# Altium PCB Scooter - Secondary Board - PCB Layout.PcbDoc
Units mm, origin at the board's own origin, x right, y up, seen from the top; angles counter-clockwise.
Board outline 51.43 x 39.37 mm, 2 copper layers (Top Layer, Bottom Layer); 10 components, 11 nets, 43 pads, 9 vias.
Unrouted connection lines stored in the file: 1.
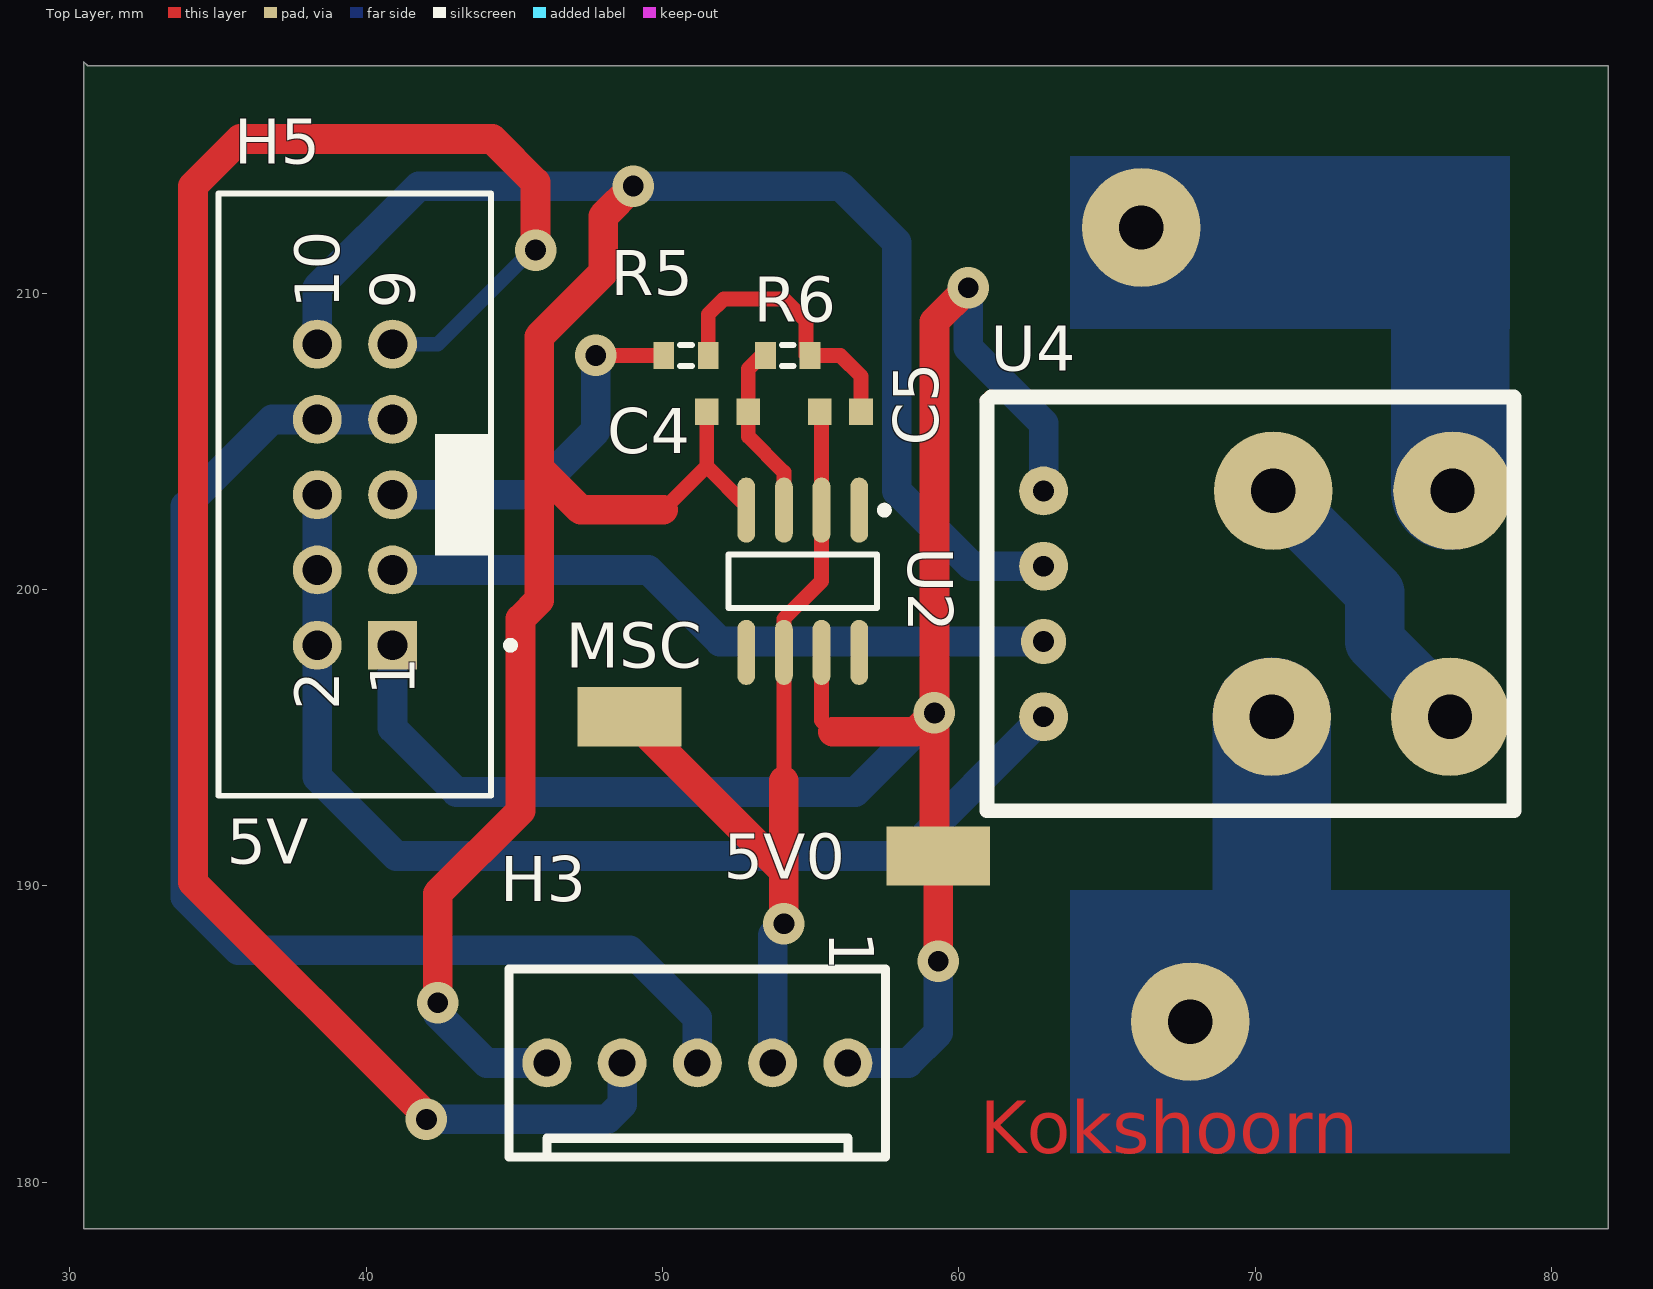
[diagram p0: Top Layer view]
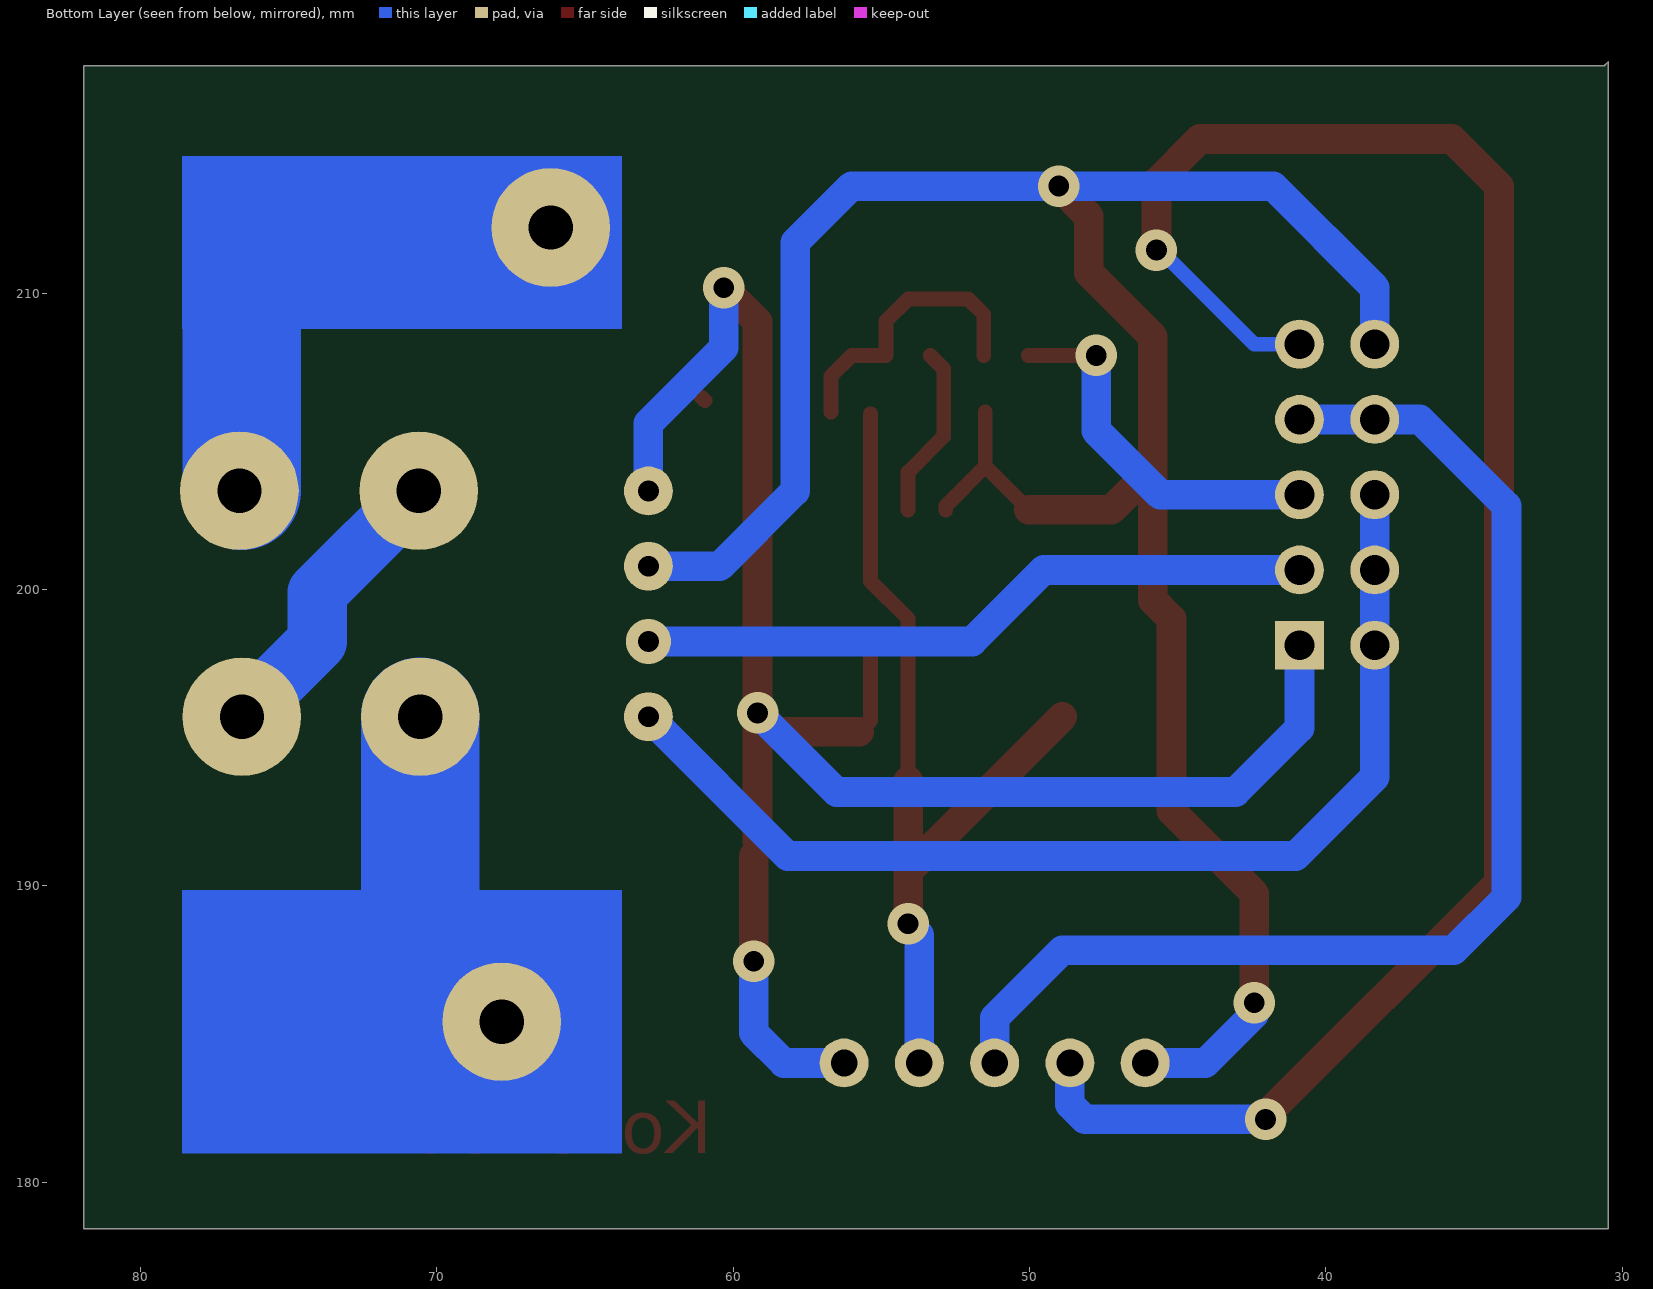
[diagram p1: Bottom Layer view, seen from below]

## Layer stack, top to bottom
Top Layer: signal copper 0.0356
Dielectric: dielectric 0.32, FR-4, Dk 4.8
Bottom Layer: signal copper 0.0356

## Board outline
30.48,217.805 30.607,217.678 81.915,217.678 81.915,178.435 30.48,178.435

## Design rules (kind name [scope] priority, off if disabled: settings)
Clearance [All] p1: gap=0.254
HoleSize [All] p1: absolutevalues=TRUE maxlimit=4 minlimit=0.3 maxpercent=80.000 minpercent=20.000
MinimumSolderMaskSliver [All] p1 off: minsoldermaskwidth=0.254
NetAntennae [All] p1 off: netantennaetolerance=0
PolygonConnect [All] p1: connectstyle=Relief reliefconductorwidth=0.254 reliefentries=4 polygonreliefangle="90 Angle" airgapwidth=0.254
RoutingVias [All] p1: holewidth=0.7 width=1.4 viastyle="Through Hole" minholewidth=0.7 minwidth=1.4 maxholewidth=0.7 maxwidth=1.5
SilkToSilkClearance [All] p1 off: silktosilkclearance=0.254
SilkToSolderMaskClearance SilkscreenOverComponentPads [IsPad] p1 off: minsilkscreentomaskgap=0.254 clearancetoexposedcopper=TRUE
SolderMaskExpansion [All] p1: expansion=0.102
Width [All] p1: maxlimit=5 minlimit=0.5 preferedwidth=0.5
23 further rules are at their usual default settings.

## Components (designator, comment, footprint, x,y, rotation, side; value= is the part's Value field where it differs from the comment)
5V0 "TP" TEST_POINT_3.5X2MM 59.309,191.008 r180 top
C4 "100nF" CAPC1608L 52.197,205.994 r0 top
C5 "100nF" CAPC1608L 56.007,205.994 r0 top
H3 "5 Pin Molex KK Hdr" MOLEX_KK_5_HDR 56.261,184.023 r180 top
H5 "Header 5X2 Vert" IDC2.54-V10D 39.624,203.2 r90 top
MSC "TP" TEST_POINT_3.5X2MM 48.895,195.707 r180 top
R5 "100k" RESC1608L 50.8,207.899 r180 top
R6 "100k" RESC1608L 54.229,207.899 r0 top
U2 "uA741C" SO8_N 54.737,200.279 r270 top
U4 "LEM - HXS 10-NP/SP3" PCBComponent_1 62.865,203.327 r270 top

## Footprints (in the part's own frame and the unit in brackets; to place one, negate y for a bottom-side part, rotate by r counter-clockwise, add the part's x,y. Pads: shape width x height; smd on the part's side, far side on the other; paste and mask are expansions set on the pad)
CAPC1608L [mm] "Chip Capacitor, Body 1.6x0.8mm, IPC High Density"
  rect 0.8x0.9 smd: 1(-0.7,0) 2(0.7,0)
  body extent -0.87,-0.48 0.87,0.48, height 0.85
IDC2.54-V10D [mm] "Connector; IDC, Low Profile Male Header, Thru-Hole; 10 Position; Vertical; Pitch 2.54 mm; Body 20.32 x 9.2 x 9.45 mm (LxWxH)"
  rect 1.65x1.65 hole 1: 1(-5.08,-1.27)
  round 1.65 hole 1: 2(-5.08,1.27) 3(-2.54,-1.27) 4(-2.54,1.27) 5(0,-1.27) 6(0,1.27) 7(2.54,-1.27) 8(2.54,1.27) 9(5.08,-1.27) 10(5.08,1.27)
  silkscreen extent -10.16,-5.38 10.16,4.6, body extent -10.16,-4.6 10.16,4.6, height 9.45
MOLEX_KK_5_HDR [mil] "MOLEX_KK_5_HDR"
  round 65 hole 35.43: 1(0,0) 2(100,0) 3(200,0) 4(300,0) 5(400,0)
  silkscreen extent -50,-125 450,125, body extent -44,-118 444,118, height 630
PCBComponent_1 [mm]
  round 1.524 hole 0.7: 1(5.08,0)
  round 4 hole 1.5: 2(7.62,7.7) 7(0,13.8) 8(0,7.747) 9(7.62,13.716)
  round 1.65 hole 0.7: 3(0,0) 4(2.54,0) 5(7.62,0)
  Top Layer lines w0.5: -3.048,-1.905 -3.175,-1.778
  silkscreen extent -3.18,-1.91 10.79,15.88
RESC1608L [mm] "Chip Resistor, Body 1.6x0.8mm, IPC High Density"
  rect 0.7x0.9 smd: 1(-0.75,0) 2(0.75,0)
  silkscreen extent -0.2,-0.35 0.2,0.35, body extent -0.85,-0.48 0.85,0.48, height 0.9
SO8_N [mm] "SOIC, 8-Leads, Body 4.9x3.9mm, Pitch 1.27mm, IPC Medium Density"
  oval 2.2x0.6 smd: 1(-2.4,1.905) 2(-2.4,0.635) 3(-2.4,-0.635) 4(-2.4,-1.905) 5(2.4,-1.905) 6(2.4,-0.635) 7(2.4,0.635) 8(2.4,1.905)
  silkscreen extent -2.52,-2.5 0.9,2.88, body extent -2,-2.5 2,2.5, height 1.75
TEST_POINT_3.5X2MM [mm] "Test Point Pad"
  rect 3.5x2 smd: 1(0,0)
  body extent -1.75,-1.01 1.75,1, height 2

## Part data
5V0 MSC: library part TP_TESTPOINT, "Test-Point SMD"
C4 C5: library part CC_100nF_0603, "CAP CER 100nF X7R +-10% 50V 0603"
H3: library part JA_MOLEX_KK_5POS, "CONN HEADER 5POS 2.54mm VERT_Thru Hole"
H5: library part JA_HDR_IDC_5X2_VERT, "IDC Header, 2,54mm, 10-Pin, Vert"
R5 R6: library part RS_10K, "RES 10.0K OHM 1/10W 5% 0603 SMD"
U2: library part LM101AJG, "High Performance Operational Amplifier"
U4: library part TC1072-3.0VCH713, "50mA and 100mA CMOS LDOs with Shutdown, Active-Low Error Output and VREF Bypass, 6-Pin SOT-23, Extended Temperature, Tape and Reel"

## Free pads (board coordinates)
  round 4 hole 1.5: 1(67.818,185.42) 2(66.167,212.217)

## Via types
v1: diameter 1.4, hole 0.7, Top Layer to Bottom Layer, 9 vias

## Nets (pads, with @x,y where several pads share a name; then routed paths per layer and width w, separated by ;. In a path a pad name is that pad's centre, name@x,y a point inside that pad or via, vN(x,y) a via of type N, cw(c..) or ccw(c..) an arc to the next point about the centre after c; other vN are vias at no path point)
5V0: 5V0.1 H3.1 H5.1 U2.7 U4.3 | length 66.1
  Top Layer w0.5: U2.7 55.372,195.58 55.753,195.199
  Top Layer w1: 55.753,195.199 58.547,195.199 v1(59.182,195.834) ; 5V0.1@59.182,191.516 v1(59.182,195.834) ; v1(59.309,187.452) 5V0.1 ; v1(60.325,210.185) 59.182,209.042 v1(59.182,195.834)
  Bottom Layer w1: H5.1 40.894,195.326 43.053,193.167 56.515,193.167 v1(59.182,195.834) ; H3.1 58.293,184.023 59.309,185.039 v1(59.309,187.452) ; v1(60.325,210.185) 60.325,208.153 62.865,205.613 U4.3
"CURRENT SIGNAL": H5.3 U4.1 | length 23
  Bottom Layer w1: H5.3 49.53,200.66 51.943,198.247 U4.1
"FILTERED MSC PWM": C5.1 H3.2 MSC.1 U2.2 U2.6 | length 29.8
  Top Layer w0.5: 54.102,193.548 U2.6 54.102,199.009 55.372,200.279 U2.2 C5.1@55.372,205.929
  Top Layer w1: MSC.1 53.975,190.627 ; v1(54.102,188.722) 54.102,193.548
  Bottom Layer w1: H3.2 53.721,188.341 v1(54.102,188.722)
GND: C4.1 H3.5 H5.10 U2.4 U4.4 | length 83.8
  Top Layer w0.5: 50.035,202.692 51.497,204.154 ; C4.1 51.497,204.154 ; U2.4 52.832,202.819 51.497,204.154
  Top Layer w1: v1(42.418,186.055) 42.418,189.738 45.212,192.532 45.212,199.009 45.847,199.644 45.847,204.089 ; v1(49.022,213.614) 48.006,212.598 48.006,210.693 45.847,208.534 45.847,204.089 ; 50.035,202.692 47.244,202.692 45.847,204.089
  Bottom Layer w1: H5.10 38.354,210.185 41.783,213.614 v1(49.022,213.614) 56.007,213.614 57.912,211.709 57.912,203.327 60.452,200.787 U4.4 ; v1(42.418,186.055) 42.418,185.674 44.069,184.023 H3.5
"MSC PWM": H5.5 R5.2 | length 12.6
  Top Layer w0.5: v1(47.752,207.899) R5.2
  Bottom Layer w1: H5.5 45.593,203.2 47.752,205.359 v1(47.752,207.899)
NetC4_2: C4.2 R6.1 U2.3 | length 5.9
  Top Layer w0.5: R6.1@53.352,207.899 52.897,207.444 C4.2 52.897,205.167 54.102,203.962 U2.3
NetC5_2: C5.2 R5.1 R6.2 | length 9.7
  Top Layer w0.5: R5.1 51.55,209.284 52.07,209.804 54.102,209.804 54.852,209.054 54.852,207.899 56.007,207.899 56.707,207.199 C5.2
NetH1_2: pad.1 U4.2 | length 12.8
  Bottom Layer w4: 70.565,185.754 U4.2 ; 74.549,185.674 76.581,187.706
"REGEN BRK": H3.3 H5.7 H5.8 | length 41.9
  Bottom Layer w1: H5.7 H5.8 36.83,205.74 33.909,202.819 33.909,189.611 35.687,187.833 48.895,187.833 51.181,185.547 H3.3
"SPEED SIGNAL": H3.4 H5.9 | length 64
  Top Layer w1: v1@42.037,182.245 34.163,190.119 34.163,213.614 35.75,215.201 44.259,215.201 45.72,213.741 v1(45.72,211.455)
  Bottom Layer w0.5: H5.9 42.418,208.28 v1@45.593,211.455
  Bottom Layer w1: v1(42.037,182.118) 48.133,182.118 48.641,182.626 H3.4
"VBAT 26V4": pad.2 U4.7 U4.8 U4.9 | length 17.6
  Bottom Layer w2: U4.8 74.041,199.898 74.041,198.247 U4.9
  Bottom Layer w4: U4.7@76.581,203.327 76.581,210.82
pads on no net: H5.2 H5.4 H5.6 U2.1 U2.5 U2.8 U4.5
copper on no net: | length 37.1
  Bottom Layer w1: 38.354,203.2 38.354,193.675 41.021,191.008 58.166,191.008 62.865,195.707

## Other copper
Top Layer:
  text "Kokshoorn" at 60.706,180.975 h1.78
Bottom Layer:
  rectangle net "VBAT 26V4": 63.754,208.788 78.613,214.63
  rectangle net NetH1_2: 63.754,180.975 78.613,189.865

## Silkscreen, mask and mechanical layers (free items; w line width, h text height)
Top Overlay:
  text "5V" at 35.306,190.754 h1.52
Mechanical 1:
  lines w0.5: 31.75,216.662 31.75,189.23 31.75,179.578 32.004,179.324 62.103,179.324 ; 31.75,216.789 80.899,216.789 80.899,188.849 ; 61.849,179.324 80.899,179.324 80.899,188.722

## Text inside footprints (layer, text, board x,y; h text height)
H3: Top Overlay "1" at 55.626,188.468 h1.52 r270
H5: Top Overlay "2" at 39.104,195.92 h1.5 r90; Top Overlay "1" at 41.644,196.42 h1.5 r90; Top Overlay "10" at 39.104,209.48 h1.5 r90; Top Overlay "9" at 41.644,209.48 h1.5 r90